# EAGLE board HC05-mdl V04 (EAGLE 7.4.0)
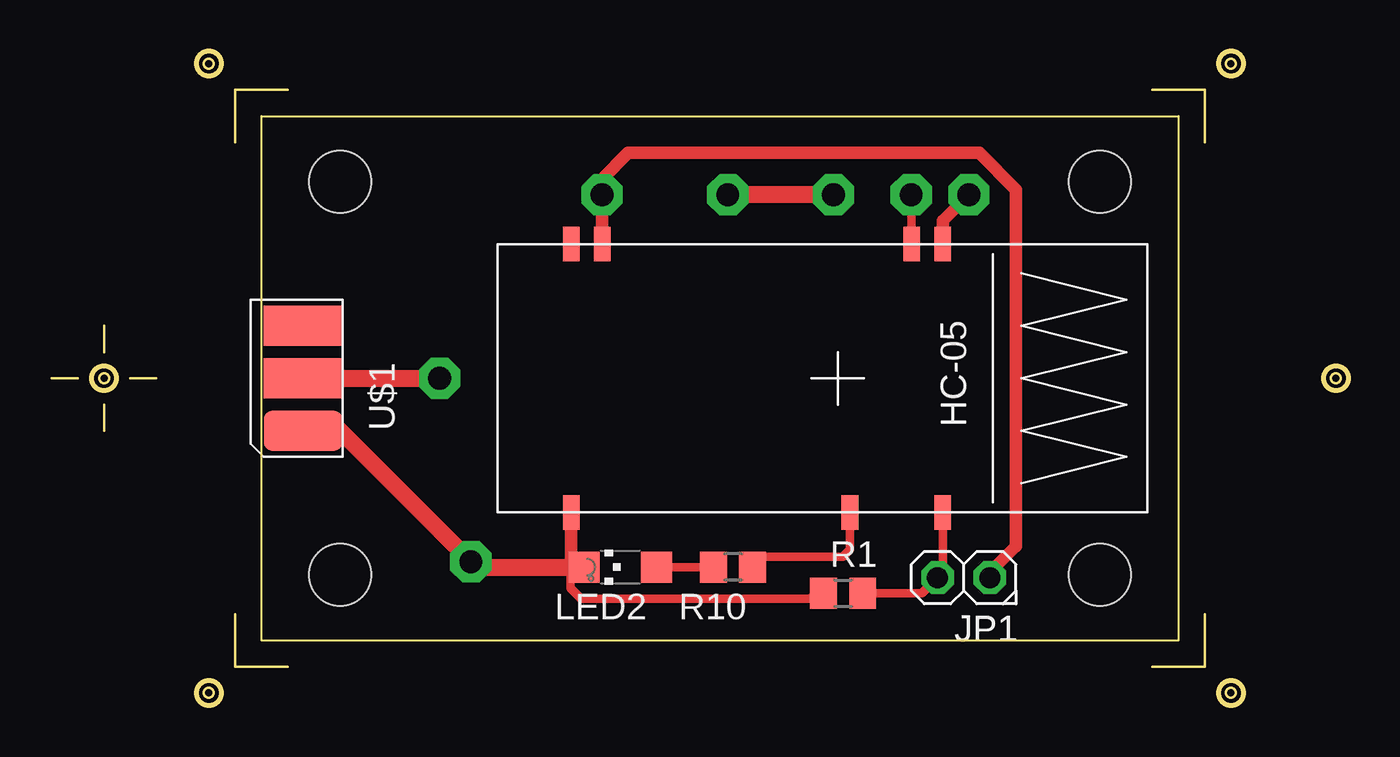
[diagram p0: board, top side]
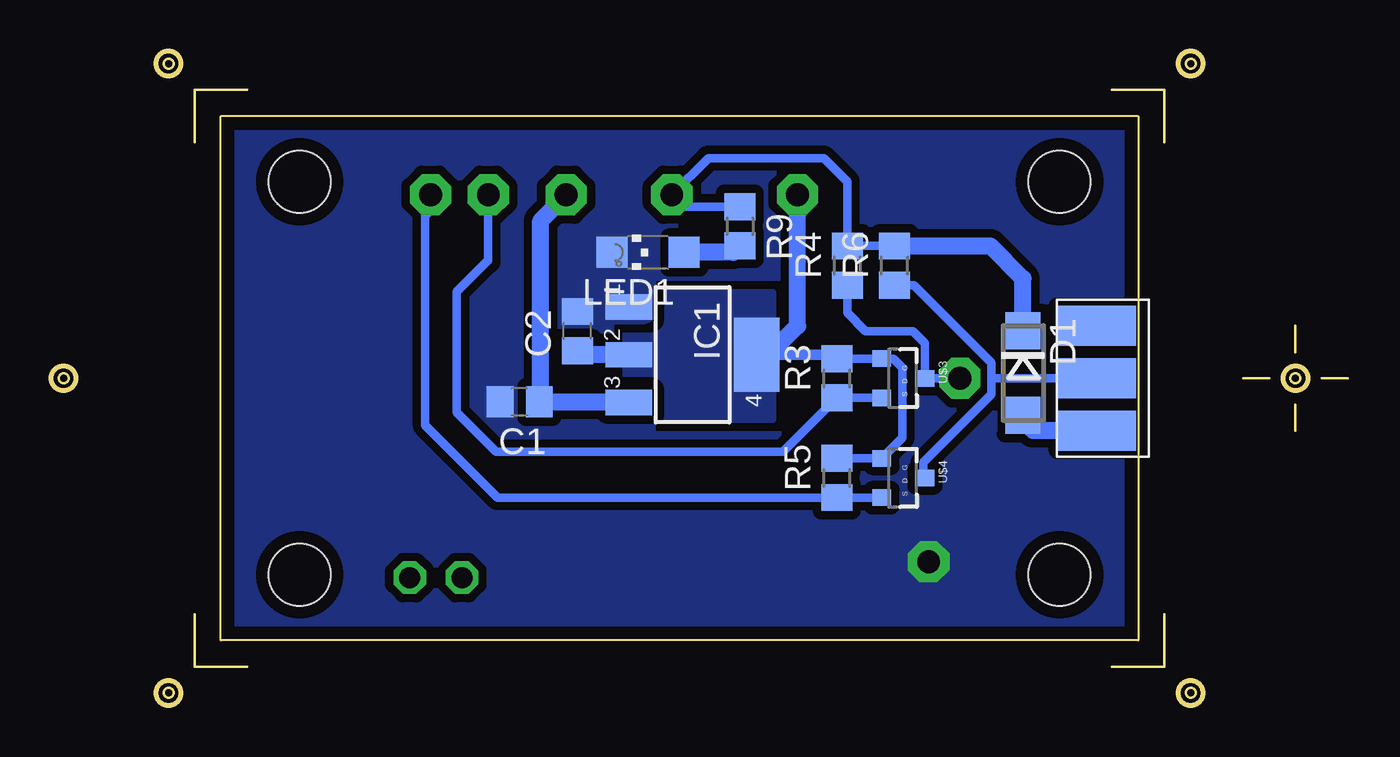
[diagram p1: board, bottom side, seen from below]

Size 62.81 x 31.65 mm. Coordinates in mm from the lower left corner, seen from the top.
Outline: 54.61,28.51 54.61,3.12 10.16,3.12 10.16,28.51
Outline: 10.16,28.52 54.61,28.52
Copper layers (1*16): Top 0.035mm / dielectric 1.5mm / Bottom 0.035mm
Design rules "TB6560 I2C V04 *": minimum track width 16mil, minimum drill 22mil, track to track 8mil, track to pad 8mil, pad to pad 8mil, via to via 12mil, smd to smd 0mil, copper to edge 24mil, drill to drill 12mil, minimum pad ring 11mil, minimum via ring 10mil, stop-mask expansion 2mil, vias tented up to drill 30mil, thermal gap 20mil
Holes 3 mm at 13.97,6.3 13.97,25.35 50.8,25.35 50.8,6.3

## Footprints (pad centres in the part's own frame; a part is rotated, then mirrored left to right if it is on the bottom)
C0805 = smd 1.3 x 1.5: 1 -0.95,0; 2 0.95,0
DO214AC = smd 1.8 x 1.7: A 2.05,0; C -2.05,0
SOT223 = smd 1.219 x 2.235: 1 -2.311,-3.099; 2 0,-3.099; 3 2.311,-3.099 | smd 3.6 x 2.2: 4 0,3.099
1X02 = drill 1.016 octagon: 1 -2.54,0; 2 0,0
CHIPLED_1206 = smd 1.5 x 1.5: A 0,-1.75; C 0,1.75
R0805 = smd 1.3 x 1.5: 1 -0.95,0; 2 0.95,0
2X03EDGE = smd 1.93 x 3.81: P$1 2.54,0; P$3 0,0; P$5 -2.54,0 | smd 1.93 x 3.81 bottom: P$2 2.54,0; P$4 0,0; P$6 -2.54,0
SOT23-FET-SMALL = smd 0.8 x 0.9: D 0,1.1; G -0.95,-1; S 0.95,-1
HC-05-MIN-SMD = smd 1.676 x 0.813: 3V3 -6.5,-11.42; GND -6.5,-12.92; GND2 6.5,-12.92; KEY 6.5,5.08; LED 6.5,0.58; RX -6.5,3.58; TX -6.5,5.08

## Placement (x,y rotation side)
C1  4U7  [C0805]  40.13,14.68 180 bottom
C2  4u7  [C0805]  37.34,18.11 90 bottom
D1  SS16  [DO214AC]  15.75,16.08 270 bottom
IC1  AMS-1117-3V3  [SOT223]  31.75,16.97 270 bottom
JP1  PINHD-1X2  [1X02]  42.93,6.17 180 top
LED1  Green  [CHIPLED_1206]  33.91,21.92 90 bottom
LED2  red  [CHIPLED_1206]  27.56,6.68 90 top
R1  10k  [R0805]  38.35,5.41 0 top
R3  10k  [R0805]  24.77,15.82 90 bottom
R4  10k  [R0805]  24.26,21.29 90 bottom
R5  10k  [R0805]  24.77,11 90 bottom
R6  10k  [R0805]  21.97,21.29 90 bottom
R9  2K2  [R0805]  29.46,23.19 270 bottom
R10  470  [R0805]  33.02,6.68 180 top
U$1  PINHD-2X3EDGE  [2X03EDGE]  12.19,15.82 270 top
U$2  MARKER  [MARKER]  7.62,31.06 0 top
U$3  2N7002-S  [SOT23-FET-SMALL]  21.59,15.82 270 bottom
U$4  2N7002-S  [SOT23-FET-SMALL]  21.59,11 270 bottom
U$5  MARKER  [MARKER]  57.15,0.58 180 top
U$6  MARKERDUAL-60  [MARKER60]  2.54,15.82 0 top
U$7  HC-05-MIN  [HC-05-MIN-SMD]  38.1,15.82 270 top
U$8  MARKER  [MARKER]  57.15,31.06 270 top
U$9  MARKER  [MARKER]  7.62,0.58 90 top

## Library data of the parts
C1 C2 R1 R3-R6 R9 R10 = rcl
D1 JP1 U$1-U$6 U$8 U$9 = MyLib
IC1 = v-reg-3
LED1 LED2 = led
U$7 = HC-05

## Nets
+3V3: C2.1 IC1.2 IC1.4 JP1.1 R3.2 R5.2 U$3.G U$4.G U$7.3V3
+5V: D1.A U$1.P$2
GND: C1.2 C2.2 IC1.1 LED1.C LED2.C R1.1 U$1.P$1 U$7.GND2
KEY_L: JP1.2 R1.2 U$7.KEY
LED: R10.1 U$7.LED
N$1: LED1.A R9.2
N$2: LED2.A R10.2
RXD_H: R4.1 U$1.P$3 U$3.D
RXD_L: R3.1 U$3.S U$7.RX
TXD_H: R6.1 U$1.P$4 U$4.D
TXD_L: R5.1 U$4.S U$7.TX
VCC: C1.1 D1.C IC1.3 R4.2 R6.2 R9.1

## Tracks (layer width: path | path; a pad name or v marks a point on that pad's centre or on a via)
+3V3  (via drill 1.1 pad 2)
  Top 0.61: U$7.3V3 v26.67,24.71 26.67,25.48 27.94,26.75 44.96,26.75 46.74,24.97 46.74,7.7 45.47,6.43 JP1.1
  Bottom 0.406: R3.2 U$3.G 22.03,16.77 21.59,16.33 21.59,12.95 U$4.G R5.2
  Bottom 0.508: R3.2 24.96,16.97 IC1.4
  Bottom 0.813: IC1.2 36.96,16.97 37.34,17.35 C2.1 | IC1.4 28.07,16.97 26.67,18.36 v26.67,24.71
  pour Bottom (isolate 0.61, no thermals): 35.05,13.79 27.81,13.79 27.81,20.02 35.05,20.02
+5V
  Bottom 0.813: U$1.P$2 15.26,13.28 D1.A
GND  (via drill 1.1 pad 2)
  Top 0.406: R1.1 36.68,5.16 25.65,5.16 25.15,5.66 25.15,6.68
  Top 0.61: U$7.GND2 25.18,6.93 | 25.18,6.93 25.4,6.93 | 25.15,6.68 25.15,6.93 25.18,6.93
  Top 0.813: LED2.C 25.15,6.68 20.57,6.68 v20.32,6.93 13.97,13.28 U$1.P$1
  pour Bottom (isolate 0.406, rank 2, no thermals): 10.16,28.52 54.48,28.52 54.61,3.12 10.16,3.12
KEY_L
  Top 0.406: U$7.KEY 43.18,6.43 JP1.2 42.16,5.41 R1.2
LED
  Top 0.406: R10.1 34.54,7.19 38.35,7.19 38.68,7.51 U$7.LED
N$1
  Bottom 0.813: R9.2 29.78,21.92 LED1.A
N$2
  Top 0.406: LED2.A R10.2
RXD_H  (via drill 1.1 pad 2)
  Top 0.813: U$1.P$3 v18.8,15.82
  Bottom 0.406: R4.1 24.26,19 23.37,18.11 21.08,18.11 20.49,17.52 U$3.D v18.8,15.82
RXD_L  (via drill 1.1 pad 2)
  Top 0.406: U$7.RX 41.66,22.32 v41.66,24.71
  Bottom 0.406: U$3.S R3.1 27.37,12.27 41.27,12.27 43.18,14.17 43.18,20.02 41.68,21.52 41.66,21.52 v41.66,24.71
TXD_H
  Bottom 0.406: U$1.P$4 17.27,15.82 | R6.1 21.02,20.34 17.27,16.59 17.27,15.82 | U$4.D 20.57,11 20.57,11.76 17.27,15.06 17.27,15.82
TXD_L  (via drill 1.1 pad 2)
  Top 0.61: v44.45,24.71 43.18,23.44 U$7.TX
  Bottom 0.406: v44.45,24.71 44.45,23.95 44.7,23.7 44.7,13.54 41.21,10.05 R5.1 U$4.S
VCC  (via drill 1.1 pad 2)
  Top 0.813: v37.89,24.71 v32.77,24.71
  Bottom 0.406: R6.2 R4.2 24.26,25.35 25.4,26.49 30.99,26.49 v32.77,24.71 32.19,24.14 R9.1
  Bottom 0.813: IC1.3 38.9,14.66 | 38.9,14.66 C1.1 | 38.9,14.66 39.12,14.81 39.12,23.44 v37.89,24.71 | D1.C 15.75,20.65 17.33,22.24 R6.2

## Text on the board
tRestrict: 3V3 | Tx
bRestrict: Rx | V04 / HC-05-mdl | Key